# Altium PCB Phy.PcbDoc
Units mil, origin at the board's own origin, x right, y up, seen from the top; angles counter-clockwise.
Board outline 3150 x 1890 mil, 2 copper layers (Top Layer, Bottom Layer); 52 components, 54 nets, 192 pads, 20 vias.
Unrouted connection lines stored in the file: 33.
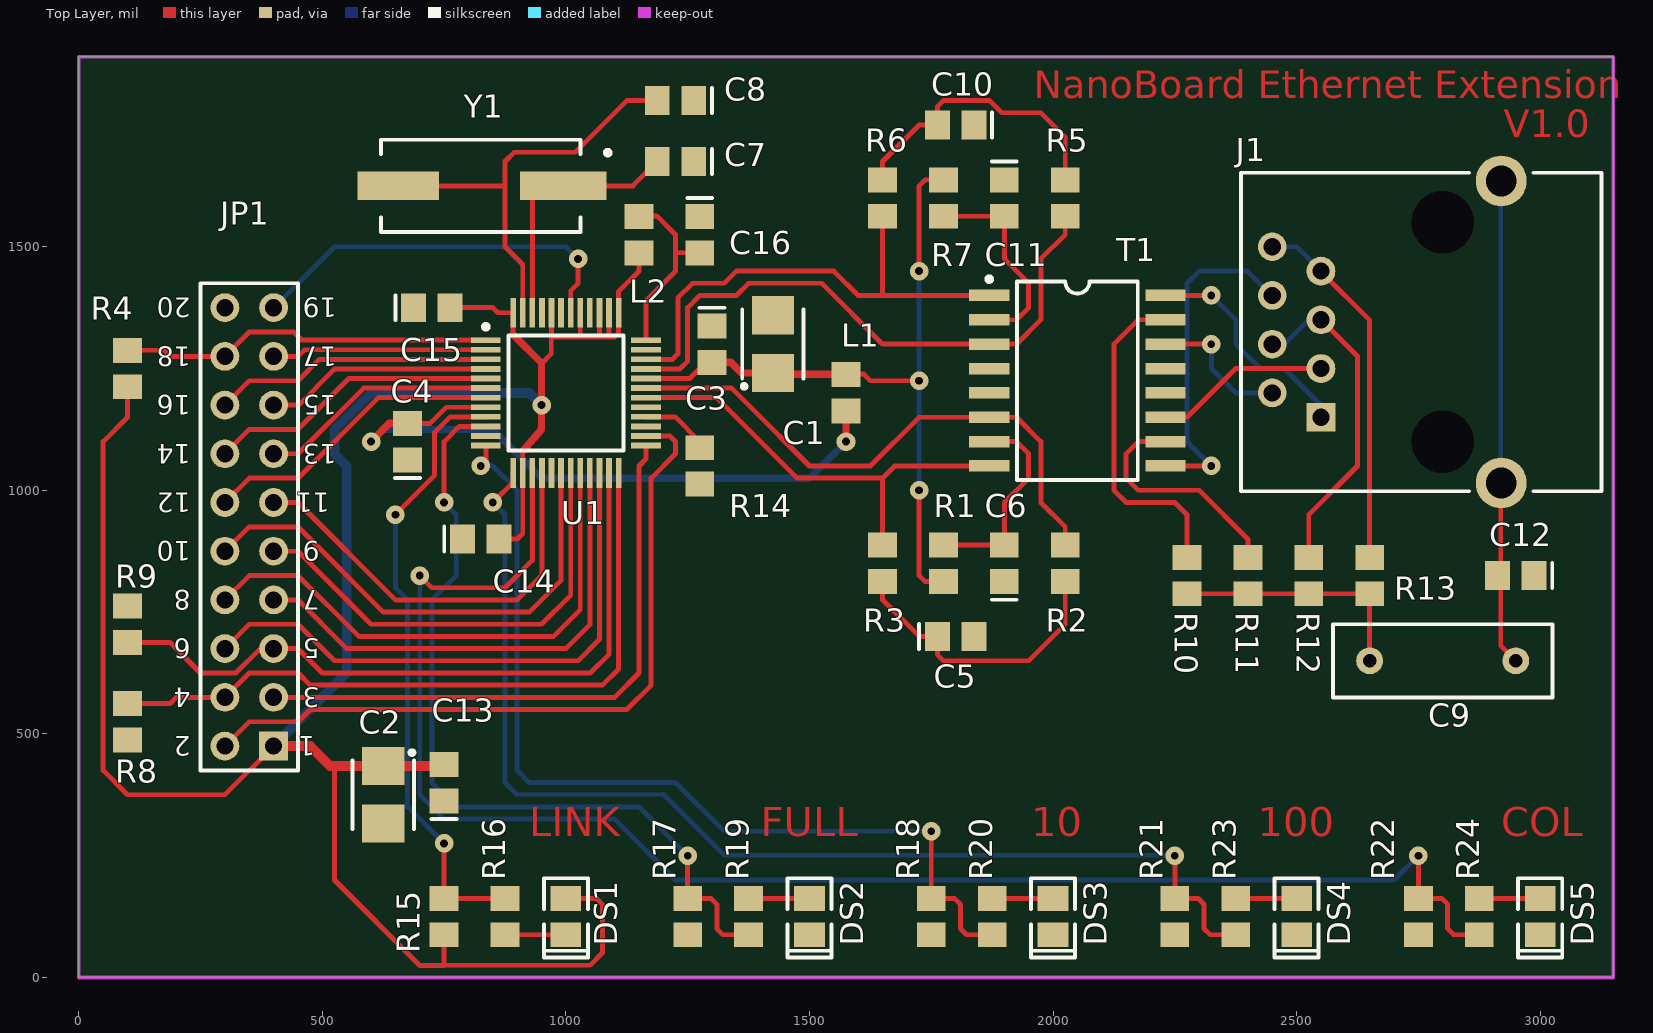
[diagram p0: Top Layer view]
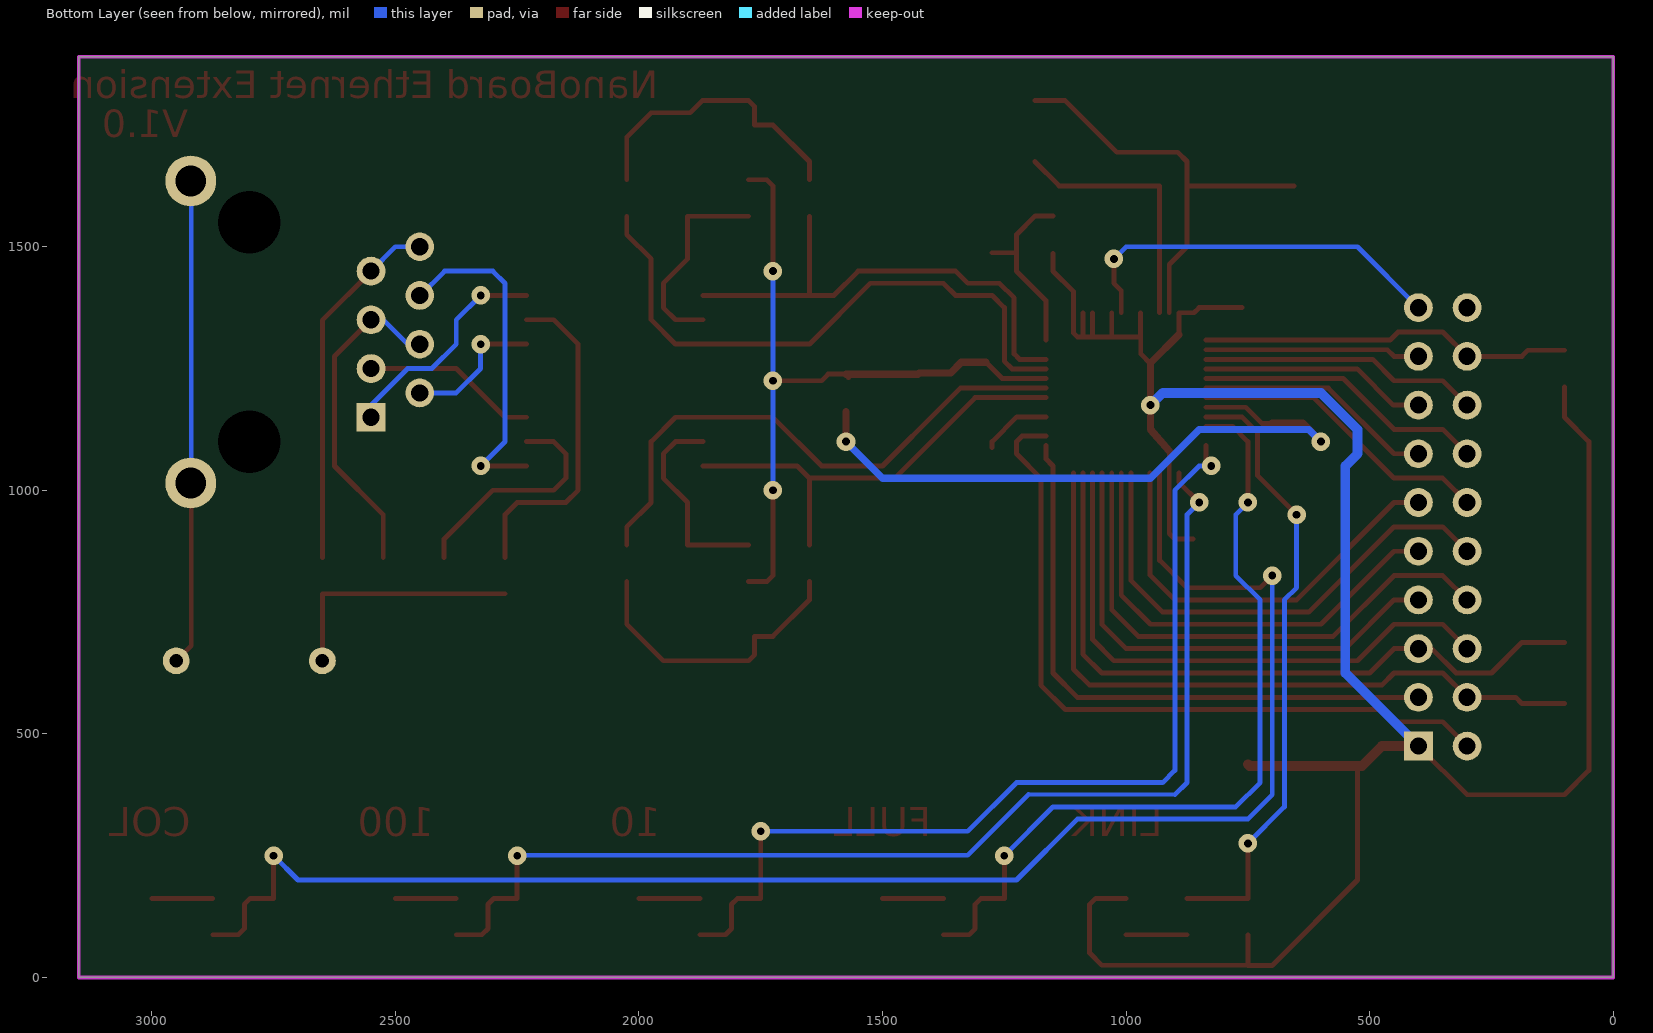
[diagram p1: Bottom Layer view, seen from below]

## Layer stack, top to bottom
Top Solder: solder mask 0.4, Solder Resist, Dk 3.5
Top Layer: signal copper 1.4
Dielectric1: dielectric 12.6, FR-4, Dk 4.8
Bottom Layer: signal copper 1.4
Bottom Solder: solder mask 0.4, Solder Resist, Dk 3.5

## Board outline
0,0 0,1890 3150,1890 3150,0

## Design rules (kind name [scope] priority, off if disabled: settings)
AssemblyTestPointUsage [All] p1: valid=2
Clearance Clearance_1 [(HasFootprint('TSQFP50P900X900-48'))] p1: gap=7.87 ignorepadtopadclearanceinfootprint=FALSE except(0: Arc-Hole Track-Hole SMDPad-Hole THPad-Hole Via-Hole Fill-Hole Poly-Hole Region-Hole Text-Hole)
Clearance [All] p2: gap=8 ignorepadtopadclearanceinfootprint=FALSE except(0: Arc-Hole Track-Hole SMDPad-Hole THPad-Hole Via-Hole Fill-Hole Poly-Hole Region-Hole Text-Hole)
ComponentClearance [All] p1: gap=8 collisioncheckmode=3 verticalgap=10 showdistances=FALSE
FabricationTestPointUsage TestPointUsage [All] p1 off: valid=2 allowmultiple=FALSE
FabricationTestpoint Testpoint [All] p1 off: side=3 testpointundercomponent=TRUE minsize=40 maxsize=100 preferedsize=60 minholesize=0 maxholesize=40 preferedholesize=32 testpointgrid=1 allowsidetop=TRUE allowsidebottom=TRUE usegrid=TRUE gridtolerance=0.01
HoleSize [All] p1: absolutevalues=TRUE maxlimit=137.79 minlimit=1 maxpercent=80.000 minpercent=20.000
MinimumSolderMaskSliver [All] p1: minsoldermaskwidth=2
PolygonConnect [All] p1: connectstyle=Direct reliefconductorwidth=10 reliefentries=4 polygonreliefangle="90 Angle" airgapwidth=10
RoutingVias [All] p1: holewidth=16 width=38 viastyle="Through Hole" minholewidth=16 minwidth=38 maxholewidth=16 maxwidth=38
SilkToSilkClearance [All] p1: silktosilkclearance=2
SilkToSolderMaskClearance SilkscreenOverComponentPads [IsPad] p1: minsilkscreentomaskgap=2 clearancetoexposedcopper=TRUE
SolderMaskExpansion [All] p1: expansion=4 istentingtop=FALSE
Width Width_Power [InNetClass('Power')] p1: maxlimit=20 minlimit=5 preferedwidth=10
Width [All] p2: maxlimit=10 minlimit=10 preferedwidth=10
22 further rules are at their usual default settings.

## Classes and differential pairs
net class Power: 3V3 3V3A GND PWFBIN PWFBOUT
net class LED[4..0]: LED0 LED1 LED2 LED3 LED4
component class U_LEDS: DS1 DS2 DS3 DS4 DS5 R15 R16 R17 R18 R19 R20 R21 R22 R23 R24
component class U_RTL8201CL: C1 C2 C3 C4 C5 C6 C7 C8 C10 C11 C13 C14 C15 C16 L1 L2 R1 R2 R3 R5 R6 R7 R14 U1 Y1
component class "U_Parallel Data Interface": JP1 R4 R8 R9
component class U_Ethernet_Con: C9 C12 J1 R10 R11 R12 R13 T1

## Components (designator, comment, footprint, x,y, rotation, side; value= is the part's Value field where it differs from the comment)
C1 "22uF 10V" CAPC3528 1425,1300 r90 top
C2 "22uF 10V" CAPC3528 625,375 r270 top
C3 "100nF 50V" CAPC2012 1300,1300 r270 top
C4 "100nF 50V" CAPC2012 675,1100 r90 top
C5 "100nF 50V" CAPC2012 1800,700 r0 top
C6 "100nF 50V" CAPC2012 1900,850 r90 top
C7 "20pF 50V" CAPC2012 1225,1675 r180 top
C8 "20pF 50V" CAPC2012 1225,1800 r180 top
C9 "100pF 3KV" CAPR7_5-3_6x7_5 2800,650 r0 top
C10 "100nF 50V" CAPC2012 1800,1750 r180 top
C11 "100nF 50V" CAPC2012 1900,1600 r270 top
C12 "100nF 50V" CAPC2012 2950,825 r180 top
C13 "100nF 50V" CAPC2012 750,400 r90 top
C14 "100nF 50V" CAPC2012 825,900 r0 top
C15 "100nF 50V" CAPC2012 725,1375 r0 top
C16 "100nF 50V" CAPC2012 1275,1525 r270 top
DS1 "RED" LED2013 1000,125 r90 top
DS2 "RED" LED2013 1500,125 r90 top
DS3 "RED" LED2013 2000,125 r90 top
DS4 "RED" LED2013 2500,125 r90 top
DS5 "RED" LED2013 3000,125 r90 top
J1 "RJ45 HEADER" 95122-2881 2685.04,1325 r90 top
JP1 "2x10 HEADER" HDR2X10 400,475 r90 top
L1 "30R@100MHz 600mA" INDC2012 1575,1200 r270 top
L2 "30R@100MHz 600mA" INDC2012 1150,1525 r90 top
R1 "0R 5%" RESC2012 1775,850 r270 top
R2 "50R 1%" RESC2012 2025,850 r270 top
R3 "50R 1%" RESC2012 1650,850 r270 top
R4 "5K1 5%" RESC2012 100,1250 r270 top
R5 "50R 1%" RESC2012 2025,1600 r270 top
R6 "50R 1%" RESC2012 1650,1600 r270 top
R7 "0R 5%" RESC2012 1775,1600 r90 top
R8 "5K1 5%" RESC2012 100,525 r90 top
R9 "5K1 5%" RESC2012 100,725 r270 top
R10 "75R 5%" RESC2012 2275,825 r270 top
R11 "75R 5%" RESC2012 2400,825 r270 top
R12 "75R 5%" RESC2012 2525,825 r270 top
R13 "75R 5%" RESC2012 2650,825 r270 top
R14 "2K 1%" RESC2012 1275,1050 r90 top
R15 "5K1 5%" RESC2012 750,125 r90 top
R16 "510R 5%" RESC2012 875,125 r90 top
R17 "5K1 5%" RESC2012 1250,125 r90 top
R18 "5K1 5%" RESC2012 1750,125 r90 top
R19 "510R 5%" RESC2012 1375,125 r270 top
R20 "510R 5%" RESC2012 1875,125 r270 top
R21 "5K1 5%" RESC2012 2250,125 r90 top
R22 "5K1 5%" RESC2012 2750,125 r90 top
R23 "510R 5%" RESC2012 2375,125 r270 top
R24 "510R 5%" RESC2012 2875,125 r270 top
T1 "TS6121C" SOIC127P910-16 2050,1225 r270 top
U1 "RTL8201CL" TSQFP50P900X900-48 1000,1200 r0 top
Y1 "25MHz" "XTAL_HC49SMD 20Mhz  +/-30ppm 20pf" 825,1625 r180 top

## Footprints (in the part's own frame and the unit in brackets; to place one, negate y for a bottom-side part, rotate by r counter-clockwise, add the part's x,y. Pads: shape width x height; smd on the part's side, far side on the other; paste and mask are expansions set on the pad)
95122-2881 [mm]
  rect 1.5x1.5 hole 0.9: 1(-4.445,3.43)
  round 1.5 hole 0.9: 2(-3.175,5.97) 3(-1.905,3.43) 4(-0.635,5.97) 5(0.635,3.43) 6(1.905,5.97) 7(3.175,3.43) 8(4.445,5.97)
  round 2.65 hole 1.6: MH1(-7.875,-5.97) MH2(7.875,-5.97)
  round 2.95 hole 3.25 unplated: MH3(-5.715,-2.92) MH4(5.715,-2.92)
  silkscreen extent -8.3,-11.2 8.3,7.6
CAPC2012 [mm]
  rect 1.3x1.5 smd: 1(-0.95,0) 2(0.95,0)
  silkscreen extent -1.9,-0.65 -1.9,0.65
CAPC3528 [mm]
  rect 2x2.2 smd: 1(-1.5,0) 2(1.5,0)
  silkscreen extent -2.3,-1.6 1.8,1.6
CAPR7_5-3_6x7_5 [mm]
  round 1.4 hole 0.7: 1(-3.81,0) 2(3.81,0)
  silkscreen extent -5.71,-1.91 5.71,1.91
HDR2X10 [mm]
  rect 1.5x1.5 hole 0.9: 1(0,0)
  round 1.5 hole 0.9: 2(0,2.54) 3(2.54,0) 4(2.54,2.54) 5(5.08,0) 6(5.08,2.54) 7(7.62,0) 8(7.62,2.54) 9(10.16,0) 10(10.16,2.54) 11(12.7,0) 12(12.7,2.54) 13(15.24,0) 14(15.24,2.54) 15(17.78,0) 16(17.78,2.54) 17(20.32,0) 18(20.32,2.54) 19(22.86,0) 20(22.86,2.54)
  silkscreen extent -1.27,-1.27 24.13,3.81
INDC2012 [mm]
  rect 1.3x1.5 smd: 1(-0.95,0) 2(0.95,0)
LED2013 [mm]
  rect 1.3x1.6 smd: 1(0.95,0) 2(-0.95,0)
  silkscreen extent -2.13,-1.15 2,1.15
RESC2012 [mm]
  rect 1.3x1.5 smd: 1(-0.95,0) 2(0.95,0)
SOIC127P910-16 [mm]
  rect 0.6x2.1 smd: 1(-4.445,-4.6) 2(-3.175,-4.6) 3(-1.905,-4.6) 4(-0.635,-4.6) 5(0.635,-4.6) 6(1.905,-4.6) 7(3.175,-4.6) 8(4.445,-4.6) 9(4.445,4.6) 10(3.175,4.6) 11(1.905,4.6) 12(0.635,4.6) 13(-0.635,4.6) 14(-1.905,4.6) 15(-3.175,4.6) 16(-4.445,4.6)
  silkscreen extent -5.42,-4.72 5.17,3.15
TSQFP50P900X900-48 [mm]
  rect 1.55x0.3 smd: 1(-4.175,2.75) 2(-4.175,2.25) 3(-4.175,1.75) 4(-4.175,1.25) 5(-4.175,0.75) 6(-4.175,0.25) 7(-4.175,-0.25) 8(-4.175,-0.75) 9(-4.175,-1.25) 10(-4.175,-1.75) 11(-4.175,-2.25) 12(-4.175,-2.75) 25(4.175,-2.75) 26(4.175,-2.25) 27(4.175,-1.75) 28(4.175,-1.25) 29(4.175,-0.75) 30(4.175,-0.25) 31(4.175,0.25) 32(4.175,0.75) 33(4.175,1.25) 34(4.175,1.75) 35(4.175,2.25) 36(4.175,2.75)
  rect 0.3x1.55 smd: 13(-2.75,-4.175) 14(-2.25,-4.175) 15(-1.75,-4.175) 16(-1.25,-4.175) 17(-0.75,-4.175) 18(-0.25,-4.175) 19(0.25,-4.175) 20(0.75,-4.175) 21(1.25,-4.175) 22(1.75,-4.175) 23(2.25,-4.175) 24(2.75,-4.175) 37(2.75,4.175) 38(2.25,4.175) 39(1.75,4.175) 40(1.25,4.175) 41(0.75,4.175) 42(0.25,4.175) 43(-0.25,4.175) 44(-0.75,4.175) 45(-1.25,4.175) 46(-1.75,4.175) 47(-2.25,4.175) 48(-2.75,4.175)
  silkscreen extent -4.3,-3 3,3.57
"XTAL_HC49SMD 20Mhz  +/-30ppm 20pf" [mm]
  rect 4.5x1.5 smd: 1(-4.3,0)
  rect 4.25x1.5 smd: 2(4.3,0)
  silkscreen extent -6.75,-2.4 5.2,2.4

## Part data
C1 C2: library part CAP-P, "Polar Capacitor"
C3 C4 C5 C6 C7 C8 C9 C10 C11 C12 C13 C14 C15 C16: library part CAP-NP, "Capacitor"
DS1 DS2 DS3 DS4 DS5: library part DIO-LED-1S, "Typical GREEN SMD LED Agilent make"
J1: library part CON-RJ45-10-RA, "Right Angle, Standard Profile, External Shield PCB Jack"
JP1: library part CON-HDR-2x10-STR, "Header, 10-Pin, Dual row"
L1 L2: library part IND-FER, "Ferrite Bead"
R1 R2 R3 R4 R5 R6 R7 R8 R9 R10 R11 R12 R13 R14 R15 R16 R17 R18 R19 R20 R21 R22 R23 R24: library part RES, "Resistor"
T1: "Bothhand 10/100 BaseT Pulse Transformer"
U1: "Realtek Ethernet PHY tranceiver"
Y1: library part CRYS, "Surface Mount Crystal"

## Via types
v1: diameter 38, hole 16, Top Layer to Bottom Layer, 20 vias

## Nets (pads, with @x,y where several pads share a name; then routed paths per layer and width w, separated by ;. In a path a pad name is that pad's centre, name@x,y a point inside that pad or via, vN(x,y) a via of type N, cw(c..) or ccw(c..) an arc to the next point about the centre after c; other vN are vias at no path point)
3V3: C2.1 C13.2 C14.2 C15.2 DS1.1 JP1.1 L2.1 R4.2 R15.1 U1.14 U1.37 U1.38 U1.39 U1.41 U1.44 U1.48 | length 5145.4
  Top Layer w10: R4.2 100,1150 50,1100 50,425 100,375 300,375 JP1.1 ; 525,434.05 525,200 700,24.61 750,24.66 1050,25 1074.8,50.2 1074.8,150 1062.4,162.4 DS1.1 ; 750,25.39 R15.1 ; C15.2 850,1375 860.63,1364.37 U1.48 891.73,1319.45 ; C14.2 900,900 911.42,911.42 U1.14 911.42,1080.55 ; 950,1260 970,1280 970,1315 1100,1315 1108.27,1323.27 U1.37 1108.27,1408.27 1150,1450 L2.1@1150,1486.61 ; 970.47,1315.47 U1.44 ; 1029.53,1315.47 U1.41 ; 1068.9,1316.1 U1.39 ; 1088.58,1316.42 U1.38
  Top Layer w15: 891.73,1319.45 950,1261.18 950,1260 v1(950,1175) 950,1125 911.42,1080.55
  Top Layer w20: JP1.1 475,475 515.94,434.06 C2.1 746.65,434.06 C13.2
  Bottom Layer w20: JP1.1 550,625 550,1050 525,1075 525,1125 600,1200 925,1200 v1(950,1175)
3V3A: C16.2 L2.2 U1.36 | length 382.6
  Top Layer w10: L2.2@1150,1563.39 1186.61,1563.39 1225,1525 1225,1450 1164.37,1389.37 U1.36 ; 1225.19,1487.6 C16.2
COL: JP1.18 R4.1 U1.1 | length 768.4
  Top Layer w10: R4.1 175.2,1287.4 187.6,1275 JP1.18 350,1325 441.54,1325 458.27,1308.27 U1.1
CRS: JP1.5 R9.2 U1.23 | length 1444
  Top Layer w10: R9.2 187.4,687.6 250,625 322.5,625 372.5,675 JP1.5 450,675 500,625 1050,625 1088.58,663.58 U1.23
GND: C1.2 C2.2 C3.1 C4.1 C5.2 C6.1 C7.1 C8.1 C10.1 C11.1 C12.1 C13.1 C14.1 C15.1 C16.1 DS2.2 DS3.2 DS4.2 DS5.2 JP1.20 R8.1 R9.1 R14.1 R17.1 R18.1 R21.1 R22.1 U1.11 U1.17 U1.29 U1.35 U1.40 U1.43 U1.45
LED0: R15.2 R16.2 U1.9 | length 1274.6
  Top Layer w10: v1(650,950) 730.63,1030.63 730.63,1119.07 762.35,1150.79 U1.9 ; v1(750,275) R15.2 R16.2
  Bottom Layer w10: v1(650,950) 650,800 675,775 675,350 v1(750,275)
LED1: R17.2 R19.2 U1.10 | length 1689.5
  Top Layer w10: v1@750.08,975.08 750.08,1100.08 781.1,1131.1 U1.10 ; v1(1250,250) R17.2 1297.6,162.4 1310,150 1310,100 1322.4,87.6 R19.2
  Bottom Layer w10: v1(750,975) 775,950 775,825 725,775 725,400 775,350 1150,350 v1(1250,250)
LED2: R18.2 R20.2 U1.12 | length 1941.5
  Top Layer w10: v1(825,1050) 835.63,1060.63 U1.12 ; v1(1750,300) R18.2 1797.6,162.4 1810,150 1810,100 1822.4,87.6 R20.2
  Bottom Layer w10: v1(825,1050) 850,1050 900,1000 900,425 925,400 1225,400 1325,300 v1(1750,300)
LED3: R21.2 R23.2 U1.13 | length 2373.3
  Top Layer w10: v1(850,975) 891.73,1016.73 U1.13 ; v1(2250,250) R21.2 2297.6,162.4 2310,150 2310,100 2322.4,87.6 R23.2
  Bottom Layer w10: v1(850,975) 875,950 875,400 900,375 1200.02,376.09 1325.02,251.09 v1(2250,250)
LED4: R22.2 R24.2 U1.15 | length 3310.3
  Top Layer w10: v1(700,825) 725,800 875,800 931.1,856.1 U1.15 ; v1(2750,250) R22.2 2797.6,162.4 2810,150 2810,100 2822.4,87.6 R24.2
  Bottom Layer w10: v1(700,825) 700,375 750,325 1100,325 1225,200 2700,200 v1(2750,250)
MDC: JP1.3 U1.25 | length 1243.4
  Top Layer w10: JP1.3 1100,575 1150,625 1150,1050 1164.37,1064.37 U1.25
MDIO: JP1.2 U1.26 | length 1512.8
  Top Layer w10: JP1.2 350,525 450,525 475,550 1125,550 1175,600 1175,1025 1225,1075 1225,1100 1213.58,1111.42 U1.26
NetC5_1: C5.1 R2.2 R3.2 | length 605.1
  Top Layer w10: R3.2 1650,775 1725,700 C5.1 1762.6,662.4 1775,650 1950,650 2025,725 R2.2
NetC6_2: C6.2 R1.1 T1.7 | length 424.8
  Top Layer w10: R1.1 C6.2 1900,975 1950,1025 1950,1075 1925,1100 T1.7
NetC7_2: C7.2 U1.46 Y1.1 | length 537.8
  Top Layer w10: U1.46 931.1,1625 1137.6,1625 C7.2
NetC8_2: C8.2 U1.47 Y1.2 | length 909.4
  Top Layer w10: Y1.2 875,1625 ; U1.47 911.42,1463.58 875,1500 875,1675 893.9,1693.9 1018.9,1693.9 1125,1800 C8.2
NetC9_1: C9.1 R10.2 R11.2 R12.2 R13.2 | length 512.6
  Top Layer w10: R10.2 R13.2 C9.1
NetC9_2: C9.2 C12.2 J1.MH1 J1.MH2 | length 997.8
  Top Layer w10: J1.MH1@2919.09,1014.96 2919.09,680.91 C9.2
  Bottom Layer w10: J1.MH1@2919.09,1014.96 J1.MH2@2919.09,1635.04
NetC10_2: C10.2 R5.1 R6.1 | length 605.1
  Top Layer w10: R6.1 1650,1675 1725,1750 C10.2 1762.6,1787.6 1775,1800 1870,1800 1895,1775 1975,1775 2025,1725 R5.1
NetC11_2: C11.2 R7.1 T1.2 | length 424.8
  Top Layer w10: R7.1 C11.2 1900,1475 1950,1425 1950,1375 1925,1350 T1.2
NetDS1_2: DS1.2 R16.1 | length 125
  Top Layer w10: R16.1 DS1.2
NetDS2_1: DS2.1 R19.1 | length 125
  Top Layer w10: R19.1 DS2.1
NetDS3_1: DS3.1 R20.1 | length 125
  Top Layer w10: R20.1 DS3.1
NetDS4_1: DS4.1 R23.1 | length 125
  Top Layer w10: R23.1 DS4.1
NetDS5_1: DS5.1 R24.1 | length 125
  Top Layer w10: R24.1 DS5.1
NetJ1_1: J1.1 T1.16 | length 466
  Top Layer w10: T1.16 v1(2325,1400)
  Bottom Layer w10: v1(2325,1400) 2375,1350 2375,1300 2425,1250 2475,1250 2549.02,1175.98 J1.1@2549.02,1150
NetJ1_2: J1.2 T1.14 | length 288.6
  Top Layer w10: T1.14 v1(2325,1300)
  Bottom Layer w10: v1(2325,1300) 2325,1250 2375,1200 J1.2@2449.02,1200
NetJ1_3: J1.3 T1.11 | length 359.3
  Top Layer w10: T1.11 2275,1150 2375,1250 J1.3@2549.02,1250
NetJ1_4: J1.4 J1.5 R12.1 | length 656.8
  Top Layer w10: R12.1 2525,950 2625,1050 2625,1275 J1.5
  Bottom Layer w10: J1.4@2449.02,1300 2475,1300 J1.5@2525,1350
NetJ1_6: J1.6 T1.9 | length 694.7
  Top Layer w10: T1.9 v1(2325,1050)
  Bottom Layer w10: v1(2325,1050) 2275,1100 2275,1425 2300,1450 2399.02,1450 J1.6@2449.02,1400
NetJ1_7: J1.7 J1.8 R13.1 | length 749.7
  Top Layer w10: J1.7@2549.02,1450 2650,1349.02 R13.1
  Bottom Layer w10: J1.8@2449.02,1500 2500,1500 J1.7@2549.02,1450.98
NetR2_1: R2.1 T1.6 U1.31 | length 1172.3
  Top Layer w10: U1.31 1340.16,1209.84 1375,1175 1500,1050 1625,1050 1725,1150 T1.6 1925,1150 1975,1100 1975,975 2025,925 R2.1
NetR3_1: R3.1 T1.8 U1.30 | length 920.9
  Top Layer w10: U1.30 1309.84,1190.16 1475,1025 1650,1025 ; R3.1 1650,1025 ; T1.8 1675,1050 1650,1025
NetR5_2: R5.2 T1.3 U1.33 | length 1253.7
  Top Layer w10: U1.33 1234.21,1249.21 1250,1265 1250,1375 1275,1400 1350,1400 1375,1425 1525,1425 1650,1300 T1.3 1925,1300 1975,1350 1975,1475 2025,1525 R5.2
NetR6_2: R6.2 T1.1 U1.34 | length 1030.2
  Top Layer w10: U1.34 1218.9,1268.9 1230,1280 1230,1395 1260,1425 1325,1425 1350,1450 1550,1450 1600,1400 T1.1 ; 1650,1400 R6.2
NetR10_1: R10.1 T1.15 | length 685.1
  Top Layer w10: T1.15 2175,1350 2125,1300 2125,1000 2150,975 2250,975 2275,950 R10.1
NetR11_1: R11.1 T1.10 | length 480.8
  Top Layer w10: T1.10 2175,1100 2150,1075 2150,1025 2175,1000 2300,1000 2400,900 R11.1
NetR14_2: R14.2 U1.28 | length 144.3
  Top Layer w10: U1.28 1224.21,1150.79 1275,1100 R14.2
PWFBIN: C4.2 L1.2 U1.8 | length 1384.3
  Top Layer w10: C4.2@700,1137.4 721.46,1137.4 754.53,1170.47 U1.8
  Top Layer w15: v1(600,1100) 637.4,1137.4 C4.2@700,1137.4 ; v1(1575,1100) L1.2@1575,1161.61
  Bottom Layer w15: v1(600,1100) 625,1125 850,1125 950,1025 1500,1025 v1(1575,1100)
PWFBOUT: C1.1 C3.2 L1.1 R1.2 R7.2 U1.32 | length 1501.1
  Top Layer w10: U1.32 1254.53,1229.53 C3.2@1287.6,1262.6 ; C1.1 C1.1@1427.56,1238.39 ; L1.1@1569.33,1230.94 L1.1@1570,1231.61 ; L1.1@1575,1238.39 1611.61,1238.39 1625,1225 v1(1725,1225) ; v1(1725,1000) 1725,825 1737.4,812.6 R1.2 ; v1(1725,1450) 1725,1625 1737.4,1637.4 R7.2
  Top Layer w15: C3.2@1287.6,1262.6 1338.43,1262.6 1360.08,1240.95 C1.1 ; C1.1@1427.56,1238.39 L1.1@1575,1238.39
  Bottom Layer w10: v1(1725,1000) v1(1725,1450)
RESETB: JP1.19 U1.42 | length 804
  Top Layer w10: U1.42 1009.84,1409.84 1025,1425 v1(1025,1475)
  Bottom Layer w10: JP1.19 525,1500 1000,1500 v1(1025,1475)
RXC: JP1.11 U1.16 | length 864.5
  Top Layer w10: JP1.11 450,975 650,775 900,775 950.79,825.79 U1.16
RXD0: JP1.7 U1.21 | length 1022.4
  Top Layer w10: JP1.7 450,775 550,675 1000,675 1049.21,724.21 U1.21
RXD1: JP1.8 U1.20 | length 1105.7
  Top Layer w10: JP1.8 350,825 450,825 575,700 975,700 1029.53,754.53 U1.20
RXD2: JP1.9 U1.19 | length 947.5
  Top Layer w10: JP1.9 450,875 600,725 950,725 1009.84,784.84 U1.19
RXD3: JP1.10 U1.18 | length 1030.8
  Top Layer w10: JP1.10 350,925 450,925 625,750 925,750 990.16,815.16 U1.18
RXDV: JP1.6 U1.22 | length 1180.6
  Top Layer w10: JP1.6 350,725 450,725 525,650 1025,650 1068.9,693.9 U1.22
RXER: JP1.4 R8.2 U1.24 | length 1460.7
  Top Layer w10: R8.2 187.6,562.4 200.2,575 JP1.4 350,625 450,625 475,600 1075,600 1108.27,633.27 U1.24
TXC: JP1.12 U1.7 | length 624.8
  Top Layer w10: JP1.12 350,1025 450,1025 615.16,1190.16 U1.7
TXD0: JP1.13 U1.6 | length 491.5
  Top Layer w10: JP1.13 450,1075 584.84,1209.84 U1.6
TXD1: JP1.14 U1.5 | length 599.6
  Top Layer w10: JP1.14 350,1125 450,1125 554.53,1229.53 U1.5
TXD2: JP1.15 U1.4 | length 466.4
  Top Layer w10: JP1.15 451.57,1175 525.79,1249.21 U1.4
TXD3: JP1.16 U1.3 | length 574.5
  Top Layer w10: JP1.16 350,1225 450,1225 493.9,1268.9 U1.3
TXEN: JP1.17 U1.2 | length 441.3
  Top Layer w10: JP1.17 450,1275 463.58,1288.58 U1.2
pads on no net: J1.MH3 J1.MH4 T1.4 T1.5 T1.12 T1.13 U1.27

## Keep-outs
Keep-Out Layer:
  the board outline again, w7.87

## Other copper
Top Layer:
  text "NanoBoard Ethernet Extension" at 1960,1805 h57.09
  text "V1.0" at 2925,1725 h57.09
  text "LINK" at 925,290 h60
  text "FULL" at 1400,290 h60
  text "10" at 1955,290 h60
  text "100" at 2420,290 h60
  text "COL" at 2920,290 h60

## Silkscreen, mask and mechanical layers (free items; w line width, h text height)
Top Overlay:
  text "Altium Advanced Training: '.Pcb_File_Name_No_Path'" at 10,-170.01 h60
Mechanical 1:
  the board outline again, w7.87

## Text inside footprints (layer, text, board x,y; h text height)
JP1: Top Overlay "2" at 230,495 h39.37 r180; Top Overlay "1" at 485,495 h39.37 r180; Top Overlay "19" at 530,1395 h39.37 r180; Top Overlay "20" at 230,1395 h39.37 r180; Top Overlay "16" at 230,1195 h39.37 r180; Top Overlay "12" at 230,995 h39.37 r180; Top Overlay "6" at 230,695 h39.37 r180; Top Overlay "15" at 530,1195 h39.37 r180; Top Overlay "11" at 515,995 h39.37 r180; Top Overlay "5" at 495,695 h39.37 r180; Top Overlay "3" at 495,595 h39.37 r180; Top Overlay "4" at 230,595 h39.37 r180; Top Overlay "7" at 495,795 h39.37 r180; Top Overlay "8" at 230,795 h39.37 r180; Top Overlay "9" at 495,895 h39.37 r180; Top Overlay "10" at 230,895 h39.37 r180; Top Overlay "13" at 530,1095 h39.37 r180; Top Overlay "14" at 230,1095 h39.37 r180; Top Overlay "17" at 530,1295 h39.37 r180; Top Overlay "18" at 230,1295 h39.37 r180